# Altium PCB OLED_0.96-inch_Pcb.PcbDoc
Units mil, origin at the board's own origin, x right, y up, seen from the top; angles counter-clockwise.
Board outline 1260 x 1260 mil, 2 copper layers (Top Layer, Bottom Layer); 21 components, 14 nets, 70 pads, 7 vias.
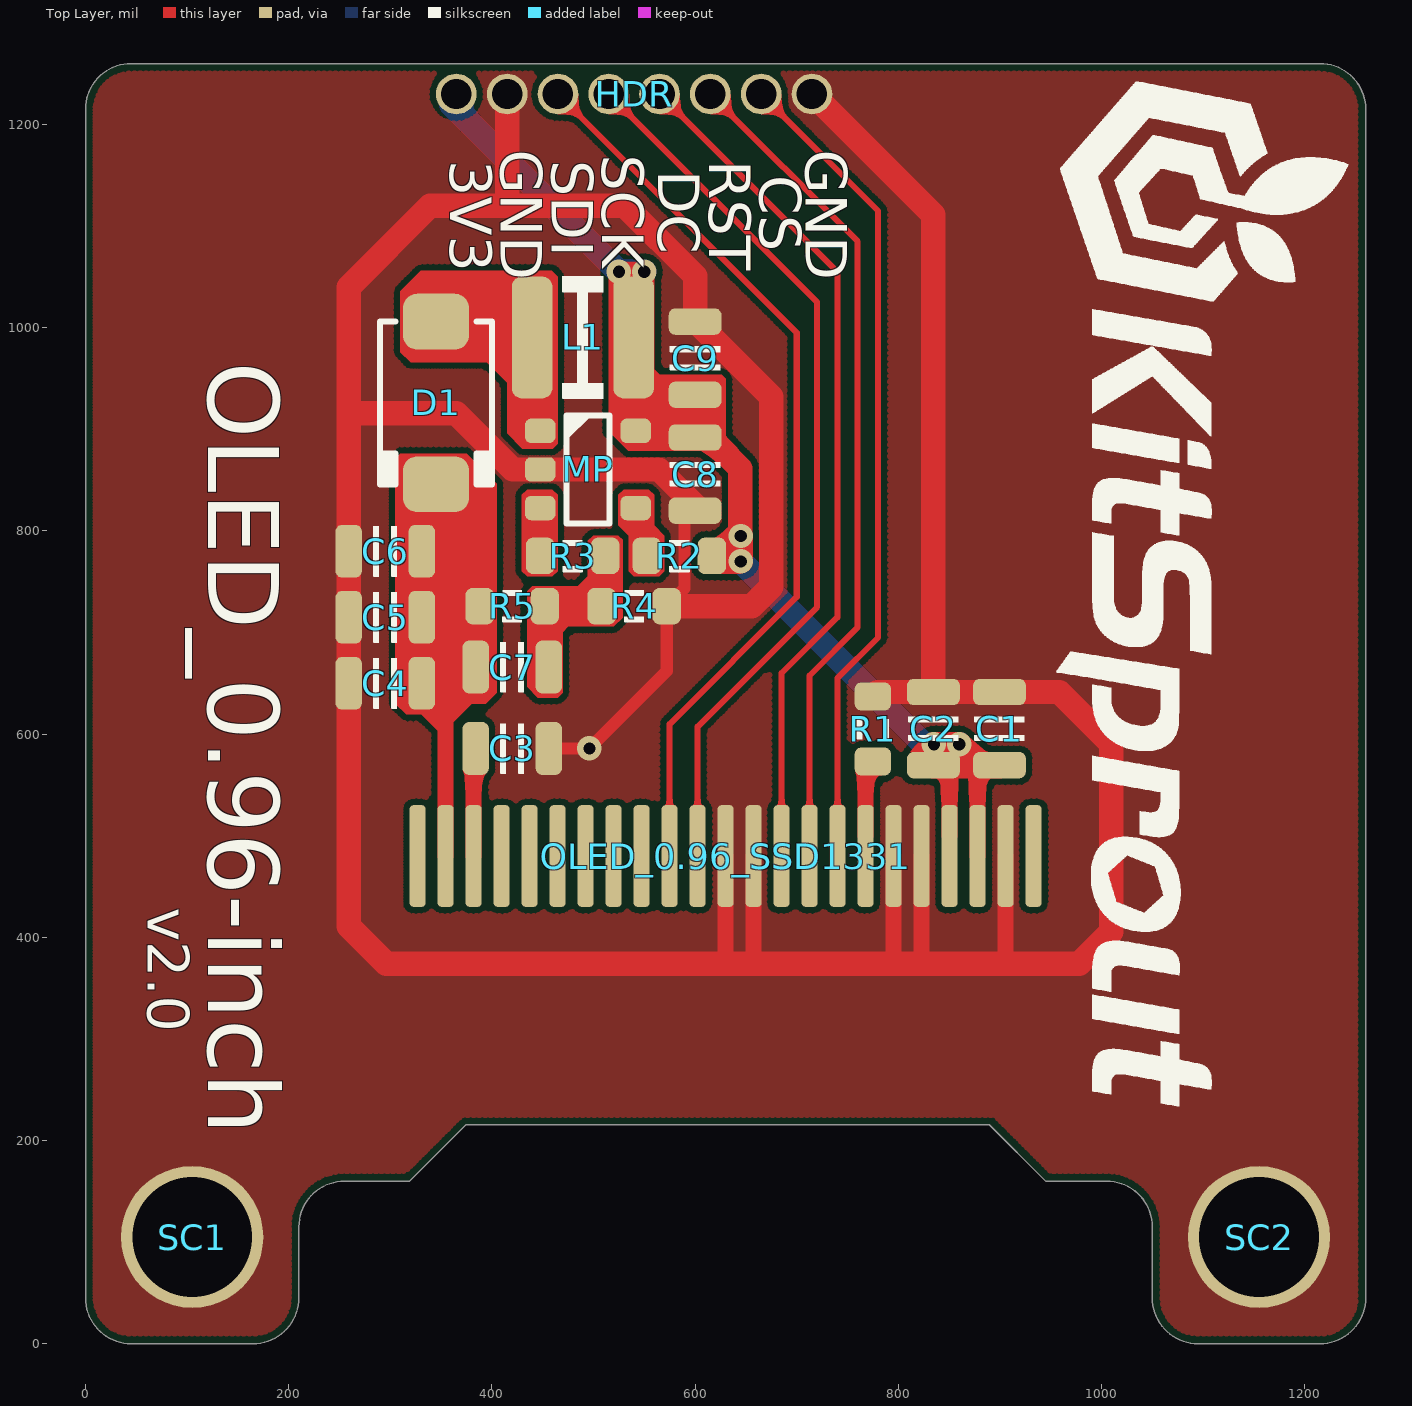
[diagram p0: Top Layer view]
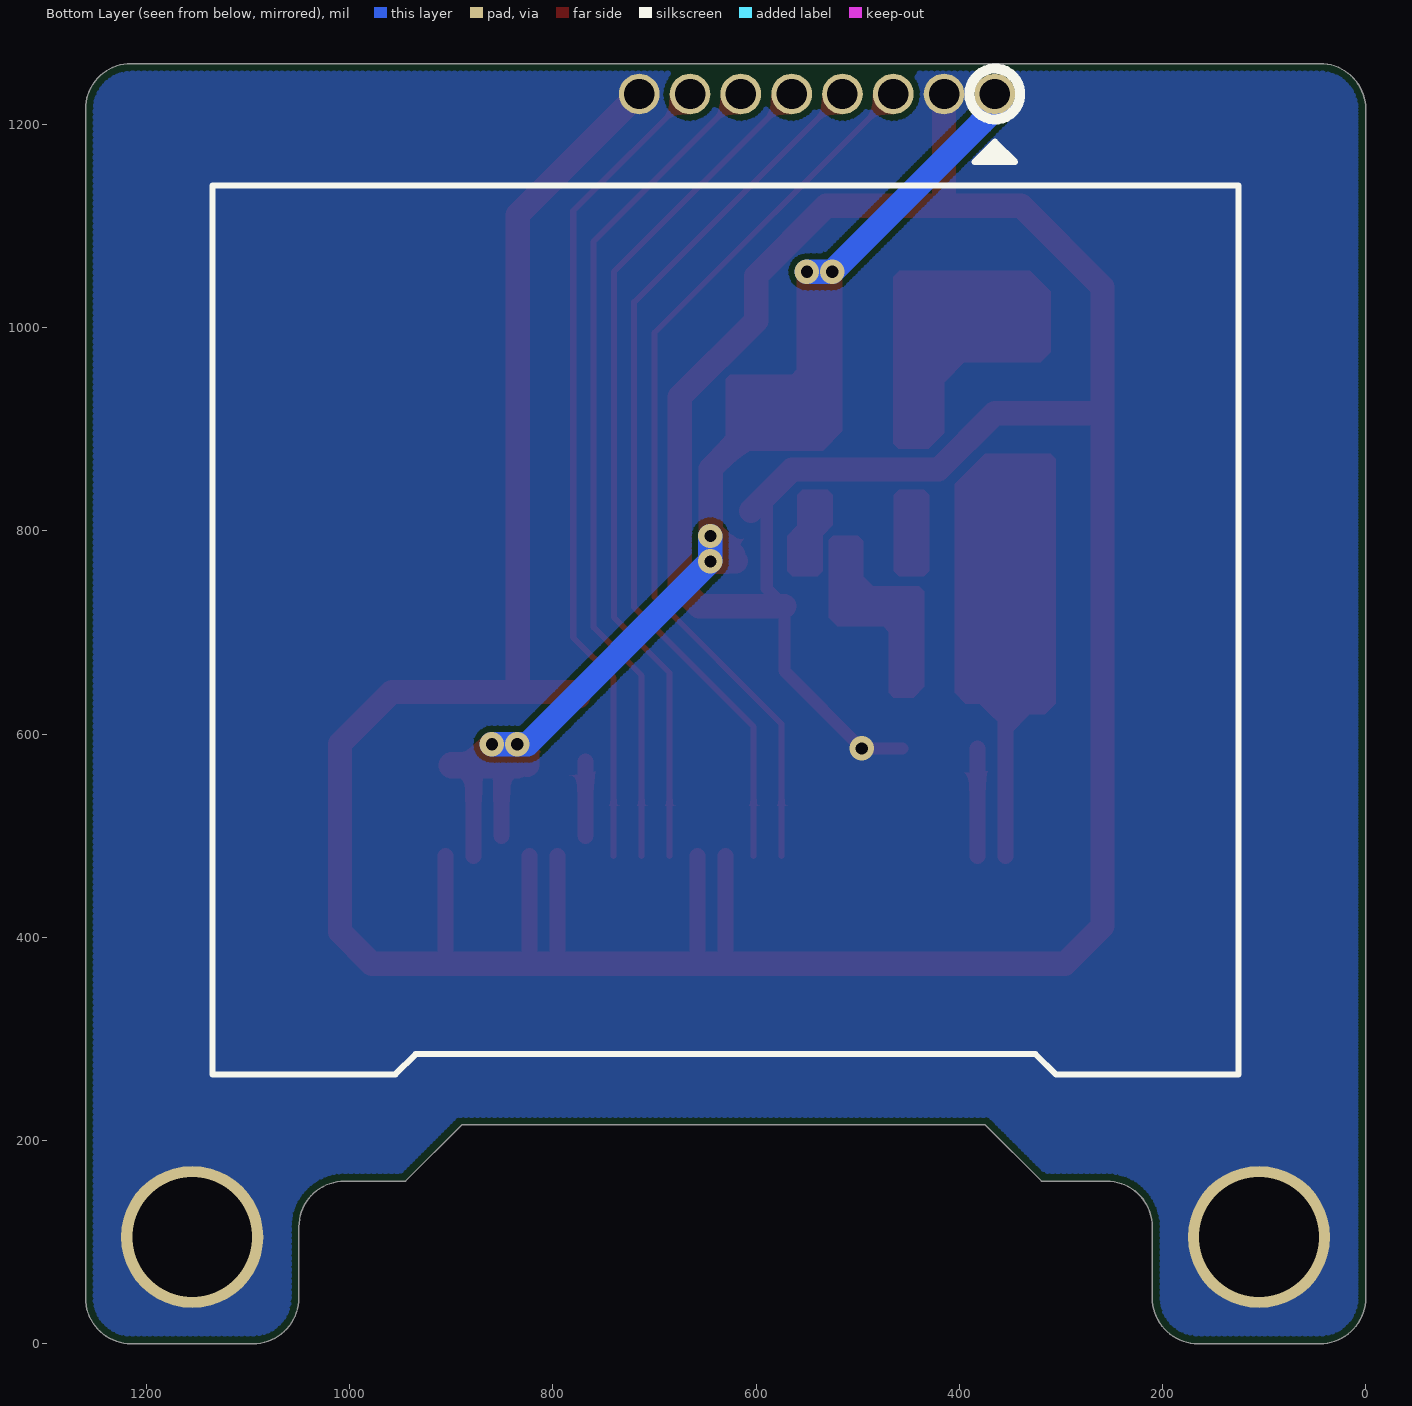
[diagram p1: Bottom Layer view, seen from below]
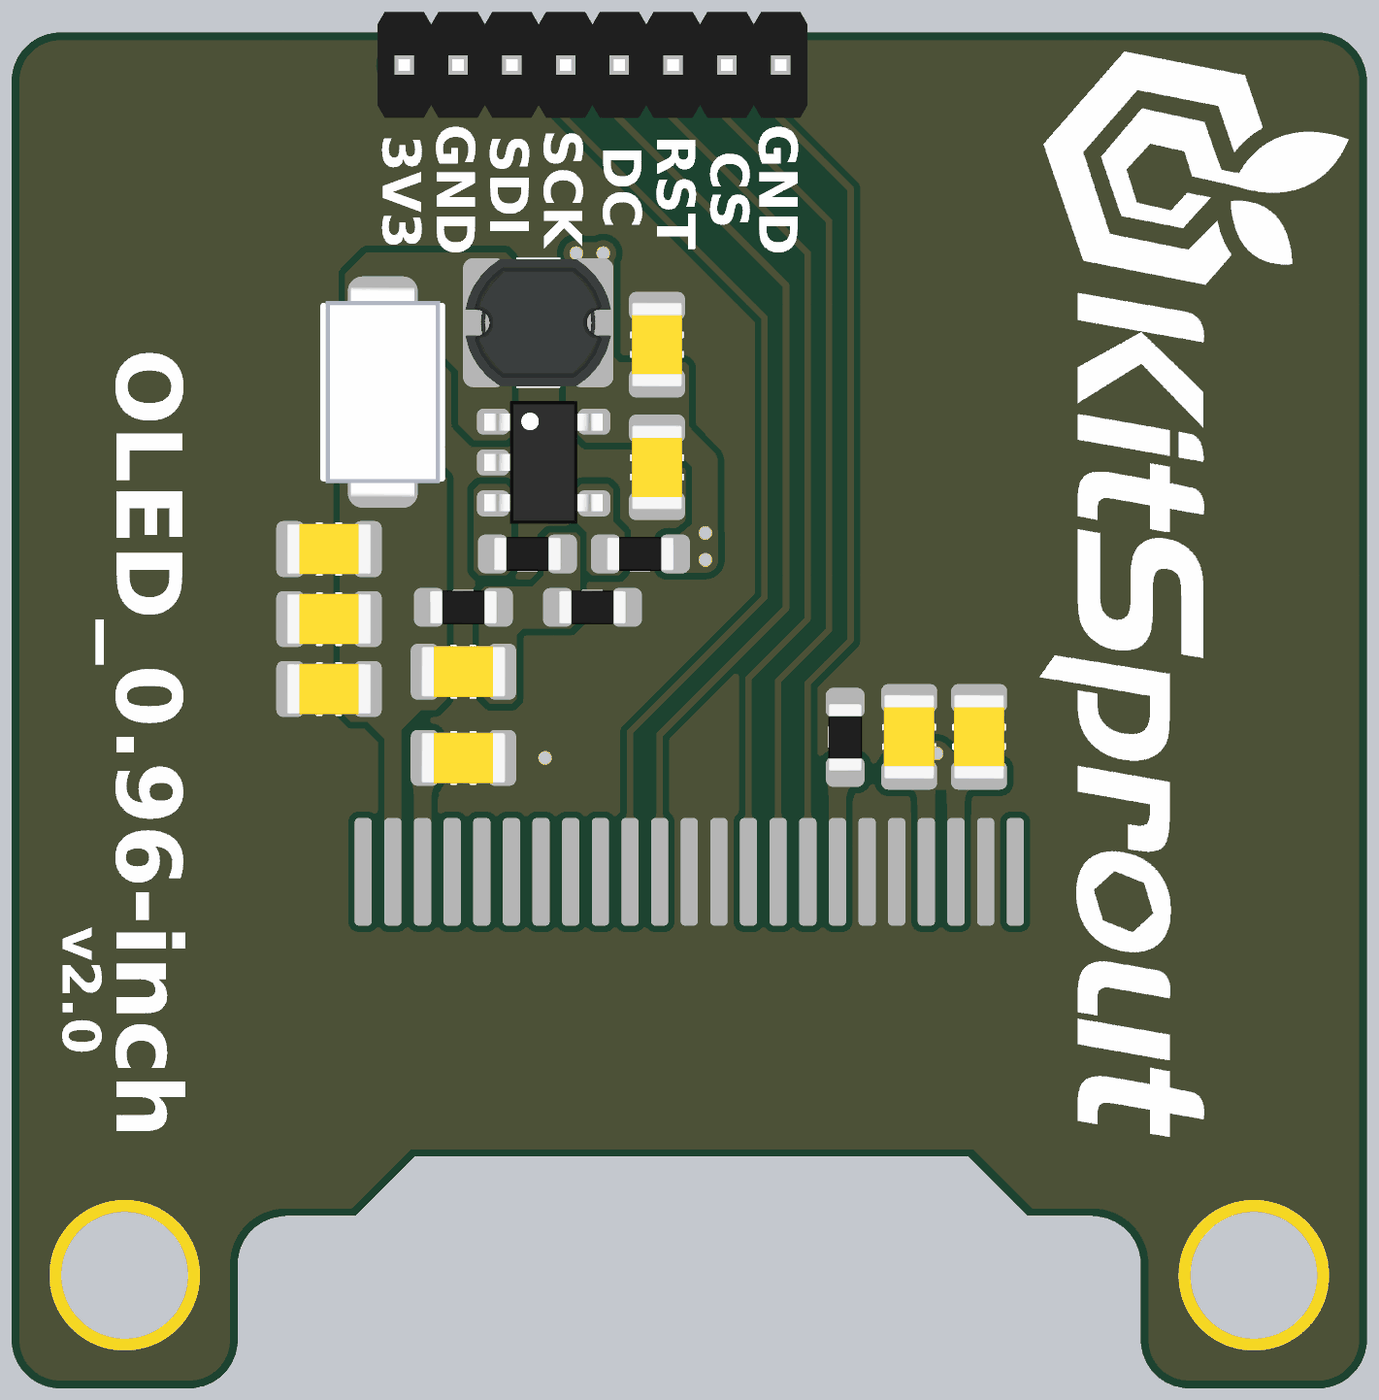
[diagram p2: 3D render of the assembled board from above, using the file's embedded part models]

## Layer stack, top to bottom
Top Solder: solder mask 0.4, Solder Resist, Dk 3.5
Top Layer: signal copper 1.4
Dielectric1: dielectric 12.6, FR-4, Dk 4.8
Bottom Layer: signal copper 1.4
Bottom Solder: solder mask 0.4, Solder Resist, Dk 3.5

## Board outline
0,45 ccw(c45,45) 45,0 165,0 ccw(c165,45) 210,45 210,115 cw(c255,115) 255,160 319.09,160 374.55,215.45 889.55,215.45 945,160 1005,160 cw(c1005,115) 1050,115 1050,45 ccw(c1095,45) 1095,0 1215,0 ccw(c1215,45) 1260,45 1260,1215 ccw(c1215,1215) 1215,1260 45,1260 ccw(c45,1215) 0,1215

## Design rules (kind name [scope] priority, off if disabled: settings)
Clearance ClearancePolygon [InPolygon] p1: gap=6
Clearance [All] p2: gap=6
ComponentClearance [All] p1: gap=0 collisioncheckmode=3 verticalgap=0 showdistances=FALSE
Height [All] p1: minheight=0 maxheight=5000 prefheight=500
HoleSize [All] p1: absolutevalues=TRUE maxlimit=200 minlimit=1 maxpercent=80.000 minpercent=20.000
HoleToHoleClearance [All] p1: gap=6 allowstackedmicrovias=TRUE
MinimumSolderMaskSliver [All] p1: minsoldermaskwidth=6
PlaneConnect [All] p1: planeconnectstyle=Direct reliefexpansion=20 reliefentries=4 reliefconductorwidth=20 reliefairgap=10
PolygonConnect [All] p1: connectstyle=Direct reliefconductorwidth=20 reliefentries=4 polygonreliefangle="90 Angle" airgapwidth=10
RoutingVias [All] p1: holewidth=12 width=20 viastyle="Through Hole" minholewidth=12 minwidth=20 maxholewidth=100 maxwidth=200
SilkToSilkClearance [All] p1: silktosilkclearance=0
SilkToSolderMaskClearance SilkscreenOverComponentPads [IsPad] p1: minsilkscreentomaskgap=1 clearancetoexposedcopper=TRUE
SolderMaskExpansion [All] p1: expansion=0
Width [All] p1: maxlimit=60 minlimit=6 preferedwidth=10
22 further rules are at their usual default settings.

## Components (designator, comment, footprint, x,y, rotation, side; value= is the part's Value field where it differs from the comment)
C1 "Cap_0805" CAP_0805 899.55,605.45 r270 top
C2 "Cap_0805" CAP_0805 834.55,605.45 r270 top
C3 "Cap_0805" CAP_0805 420,585.91 r180 top
C4 "Cap_0805" CAP_0805 295,650 r0 top
C5 "Cap_0805" CAP_0805 295,715 r0 top
C6 "Cap_0805" CAP_0805 295,780 r0 top
C7 "Cap_0805" CAP_0805 420,666 r180 top
C8 "Cap_0805" CAP_0805 600,855.91 r90 top
C9 "Cap_0805" CAP_0805 600,970 r270 top
D1 "Diode_SMA" DO-214AC 345,925.91 r270 top
HDR "HDR1x8_1.27" HDR1X8_1.27_180 365,1230 r90 top
L1 "Ind_CD32" IND_CD32 489.55,990.45 r0 top
MP "MP1541" SOT23-5 494.55,860.45 r0 top
OLED_0.96_SSD1331 "OLED_0.96_SSD1331" OLED_0.96_96x64_SSD1331 630,630 r0 top
R1 "Res_0603" RES_0603 775,605 r270 top
R2 "Res_0603" RES_0603 584.55,775.45 r0 top
R3 "Res_0603" RES_0603 479.55,775.45 r0 top
R4 "Res_0603" RES_0603 540,725.91 r180 top
R5 "Res_0603" RES_0603 420,725.91 r180 top
SC1 "M3" SCRREW_M3 105,105 r0 top
SC2 "M3" SCRREW_M3 1155,105 r270 top

## Footprints (in the part's own frame and the unit in brackets; to place one, negate y for a bottom-side part, rotate by r counter-clockwise, add the part's x,y. Pads: shape width x height; smd on the part's side, far side on the other; paste and mask are expansions set on the pad)
CAP_0805 [mil]
  rrect50% 26x52 smd: 1(-36,0) 2(36,0)
  silkscreen extent -12,-25 12,25, body extent -39,-24 39,24, height 50
DO-214AC [mil] "SMA"
  rrect50% 55x65 smd: 1(-80,0) 2(80,0)
  silkscreen extent -80,-55 80,55, body extent -98,-53 98,53, height 85
HDR1X8_1.27_180 [mil]
  round 40 hole 30: 1(0,0) 2(0,-50) 3(0,-100) 4(0,-150) 5(0,-200) 6(0,-250) 7(0,-300) 8(0,-350)
  body extent -49,-375 49,25, height 210
IND_CD32 [mil]
  rrect50% 40x120 smd: 1(-50,0) 2(50,0)
  silkscreen extent -20,-60 20,60, body extent -68,-59 68,59, height 83
OLED_0.96_96x64_SSD1331 [mil]
  rrect50% 16x100 smd: 1(303.15,-150) 2(275.59,-150) 3(248.03,-150) 4(220.47,-150) 5(192.91,-150) 6(165.35,-150) 7(137.8,-150) 8(110.24,-150) 9(82.68,-150) 10(55.12,-150) 11(27.56,-150) 12(0,-150) 13(-27.56,-150) 14(-55.12,-150) 15(-82.68,-150) 16(-110.24,-150) 17(-137.8,-150) 18(-165.35,-150) 19(-192.91,-150) 20(-220.47,-150) 21(-248.03,-150) 22(-275.59,-150) 23(-303.15,-150)
RES_0603 [mil]
  rrect50% 28x36 smd: 1(-32,0) 2(32,0)
  silkscreen extent -10,-16 10,16, body extent -31,-16 32,16, height 20
SCRREW_M3 [mil]
  round 140 hole 118 mask+0: 0(0,0)
SOT23-5 [mil]
  rrect50% 30x24 smd: 1(-47,38) 2(-47,0) 3(-47,-38) 4(47,-38) 5(47,38)
  silkscreen extent -21,-53 21,53, body extent -55,-57 55,57, height 57

## Part data
C1 C2 C3 C4 C5 C6 C7 C8 C9: "Capacitor"
D1: "Diode"
HDR: "Header"
L1: "Inductor"
MP: "Boost"
OLED_0.96_SSD1331: "OLED"
R1 R2 R3 R4 R5: "Resistor"
SC1 SC2: library part Screw_M3, "Screw"

## Via types
v1: diameter 24, hole 12, Top Layer to Bottom Layer, 7 vias

## Nets (pads, with @x,y where several pads share a name; then routed paths per layer and width w, separated by ;. In a path a pad name is that pad's centre, name@x,y a point inside that pad or via, vN(x,y) a via of type N, cw(c..) or ccw(c..) an arc to the next point about the centre after c; other vN are vias at no path point)
3V3: C1.2 C2.2 C8.2 C9.2 HDR.1 L1.2 MP.5 OLED_0.96_SSD1331.3 OLED_0.96_SSD1331.4 R2.2 | length 1069.1
  Top Layer w10: R2.2 R2.2@624.55,783.45
  Top Layer w16: OLED_0.96_SSD1331.4@850.47,500 C2.2@850.47,569.45 ; OLED_0.96_SSD1331.3 C1.2@878.03,569.45
  Top Layer w24: C8.2@614,891.91 644.55,861.36 644.55,798.64 R2.2@622.38,776.48 ; R2.2@620,770 v1(645,770) v1(645,795) ; C2.2@825,570 825,580 v1(835,590) v1(860,590) C1.2@877.68,572.32
  Top Layer w26: C2.2@835,569.45 850.47,569.45 878.03,569.45 C1.2
  Bottom Layer w24: HDR.1@360,1220 v1(525,1055) v1(550,1055) ; v1(645,795) v1(645,770) 825,590 v1(835,590) v1(860,590)
CS: HDR.7 OLED_0.96_SSD1331.8 | length 814.7
  Top Layer w6: HDR.7@664.55,1230.45 780,1115 780,695 740.24,655.24 OLED_0.96_SSD1331.8
DC: HDR.5 OLED_0.96_SSD1331.10 | length 845.9
  Top Layer w6: HDR.5@564.55,1230.45 740,1055 740,715 685.12,660.12 OLED_0.96_SSD1331.10
GND: C1.1 C2.1 C3.1 C4.1 C5.1 C6.1 C8.1 C9.1 HDR.2 HDR.8 MP.2 OLED_0.96_SSD1331.2 OLED_0.96_SSD1331.5 OLED_0.96_SSD1331.6 OLED_0.96_SSD1331.11 OLED_0.96_SSD1331.12 R1.1 R4.1 SC1.0 SC2.0 | length 4681.8
  Top Layer w12: C3.1 v1(495.91,585.91) 572,662 R4.1 589.55,743.45 C8.1@589.55,823.45
  Top Layer w16: 630,374.09 OLED_0.96_SSD1331.12 ; 657.56,374.09 OLED_0.96_SSD1331.11 ; 795.35,374.09 OLED_0.96_SSD1331.6 ; 822.91,374.09 OLED_0.96_SSD1331.5 ; 905.59,374.09 OLED_0.96_SSD1331.2
  Top Layer w24: 415,1120 HDR.2@415,1230.45 ; R4.1 655.91,725.91 675,745 675,931.9 600,1006.91 600,1050.91 530.9,1120 339.09,1120 259,1039.91 259,915.91 ; C8.1@605,819.91 564.45,860.45 420.45,860.45 365,915.91 259,915.91 ; HDR.8@714.87,1230.77 834.55,1111.09 C2.1 ; R1.1 779.45,641.45 C2.1 ; 259,915.91 259,411 295.91,374.09 630,374.09 657.56,374.09 795.35,374.09 822.91,374.09 905.59,374.09 978.19,374.09 1009.55,405.45 1009.55,590.45 958.55,641.45 C1.1 C2.1
NetC3_2: C3.2 OLED_0.96_SSD1331.21 | length 105.9
  Top Layer w16: OLED_0.96_SSD1331.21 C3.2@381.97,585.91
NetC7_1: C7.1 R3.2 R4.2 R5.1
NetD1_1: D1.1 L1.1 MP.1
NetMP_3: MP.3 R3.1
NetMP_4: MP.4 R2.1
NetOLED_0.96_SSD1331_7: OLED_0.96_SSD1331.7 R1.2 | length 73
  Top Layer w16: OLED_0.96_SSD1331.7@767.8,500 R1.2@767.8,573
RST: HDR.6 OLED_0.96_SSD1331.9 | length 830.3
  Top Layer w6: HDR.6@614.55,1230.45 760,1085 760,705 712.68,657.68 OLED_0.96_SSD1331.9
SCK: HDR.4 OLED_0.96_SSD1331.13 | length 884.2
  Top Layer w6: HDR.4@514.55,1230.45 720,1025 720,725 602.44,607.44 OLED_0.96_SSD1331.13
SDI: HDR.3 OLED_0.96_SSD1331.14 | length 899.8
  Top Layer w6: HDR.3@464.55,1230.45 700,995 700,735 574.88,609.88 OLED_0.96_SSD1331.14
VCC: C4.2 C5.2 C6.2 C7.2 D1.2 OLED_0.96_SSD1331.22 R5.2 | length 175.6
  Top Layer w16: C4.2@331,645.91 354.41,622.5 OLED_0.96_SSD1331.22
pads on no net: OLED_0.96_SSD1331.1 OLED_0.96_SSD1331.15 OLED_0.96_SSD1331.16 OLED_0.96_SSD1331.17 OLED_0.96_SSD1331.18 OLED_0.96_SSD1331.19 OLED_0.96_SSD1331.20 OLED_0.96_SSD1331.23

## Polygon pours and split planes (outlines as drawn)
GND on Top Layer "Top Layer-No Net" (hatched 45Degree grid 4 track 6, remove dead copper, pour order 7): 45,1250 ccw(c45,1215) 10,1215 10,1195 10,45 ccw(c45,45) 45,10 165,10 ccw(c165,45) 200,45 200,115 cw(c255,115) 255,170 315,170 370,225 895,225 950,170 995,170 1005,170 cw(c1005,115) 1060,115 1060,45 ccw(c1095,45) 1095,10 1215,10 ccw(c1215,45) 1250,45 1250,1215 ccw(c1215,1215) 1215,1250
GND on Bottom Layer "Top Layer-No Net" (hatched 45Degree grid 4 track 6, remove dead copper, pour order 9): 45,1250 ccw(c45,1215) 10,1215 10,1195 10,45 ccw(c45,45) 45,10 165,10 ccw(c165,45) 200,45 200,115 cw(c255,115) 255,170 315,170 370,225 895,225 950,170 995,170 1005,170 cw(c1005,115) 1060,115 1060,45 ccw(c1095,45) 1095,10 1215,10 ccw(c1215,45) 1250,45 1250,1215 ccw(c1215,1215) 1215,1250

## Other copper
Top Layer:
  region net VCC: 404.55,846.36 375,875.91 310,875.9 305,870.91 305,630.01 315.56,619.45 330.55,619.45 349.55,600.45 350.55,600.45 380.11,630.01 394.11,630.01 404.55,640.45
  region net NetMP_3: 459.55,755.45 464.55,760.45 464.55,835.45 459.55,840.45 434.55,840.45 429.55,835.45 429.55,760.45 434.55,755.45
  region net NetC7_1: 528.55,791.45 524.55,795.45 499.55,795.45 494.55,790.45 494.55,755.45 484.55,745.45 439.55,745.45 434.55,740.45 434.55,646.36 445,635.91 465,635.91 469.55,640.45 469.55,700.45 475,705.91 520,705.91 528.55,714.45
  region net NetMP_4: 559.55,835.45 554.55,840.45 529.55,840.45 524.55,835.45 524.55,805.45 534.55,795.45 534.55,760.45 539.55,755.45 564.55,755.45 569.55,760.45 569.55,795.45 559.55,805.45
  region net 3V3: 625,878.91 630,883.91 630,949.91 626,953.91 565,953.91 560,958.91 560,1050.91 545.9,1065 529.09,1065 515,1050.91 515,898 534.09,878.91
  region net NetD1_1: 460,880.91 465,885.91 465,1050 459.09,1055.91 330,1055.91 310,1035.91 310,975.91 320,965.91 395,965.91 415,945.91 415,895.91 430,880.9

## Silkscreen, mask and mechanical layers (free items; w line width, h text height)
Top Overlay:
  drawing of 5028 lines, arcs and shapes, not listed
  text "GND" at 395,1175 h70 r270
  text "GND" at 695,1175 h70 r270
  text "SCK" at 495,1170 h70 r270
  text "3V3" at 345,1165 h70 r270
  text "SDI" at 445,1165 h70 r270
  text "RST" at 600,1165 h70 r270
  text "DC" at 550,1155 h70 r270
  text "CS" at 650,1150 h70 r270
  text "OLED_0.96-inch" at 97.43,966.51 h120 r270
  text "v2.0" at 47.43,429.11 h70 r270
Bottom Overlay:
  circle w10: c365,1230 r25.01
  region: 385,1163.25 345,1163.25 365,1183.25
  lines w6: 125,265 305,265 325,285 935,285 955,265 1135,265 1135,1140 125,1140 125,265 ; 345,1163.25 385,1163.25 365,1183.25 345,1163.25
Mechanical 1:
  the board outline again, w2
Drill Drawing:
  text ".legend" at 1390,10 h60